# Altium PCB PCB1.PcbDoc (part 1 of 2)
Units mm, origin at the board's own origin, x right, y up, seen from the top; angles counter-clockwise.
Board outline 126.06 x 70 mm, 2 copper layers (Top Layer, Bottom Layer); 146 components, 103 nets, 443 pads, 623 vias.
Unrouted connection lines stored in the file: 85.
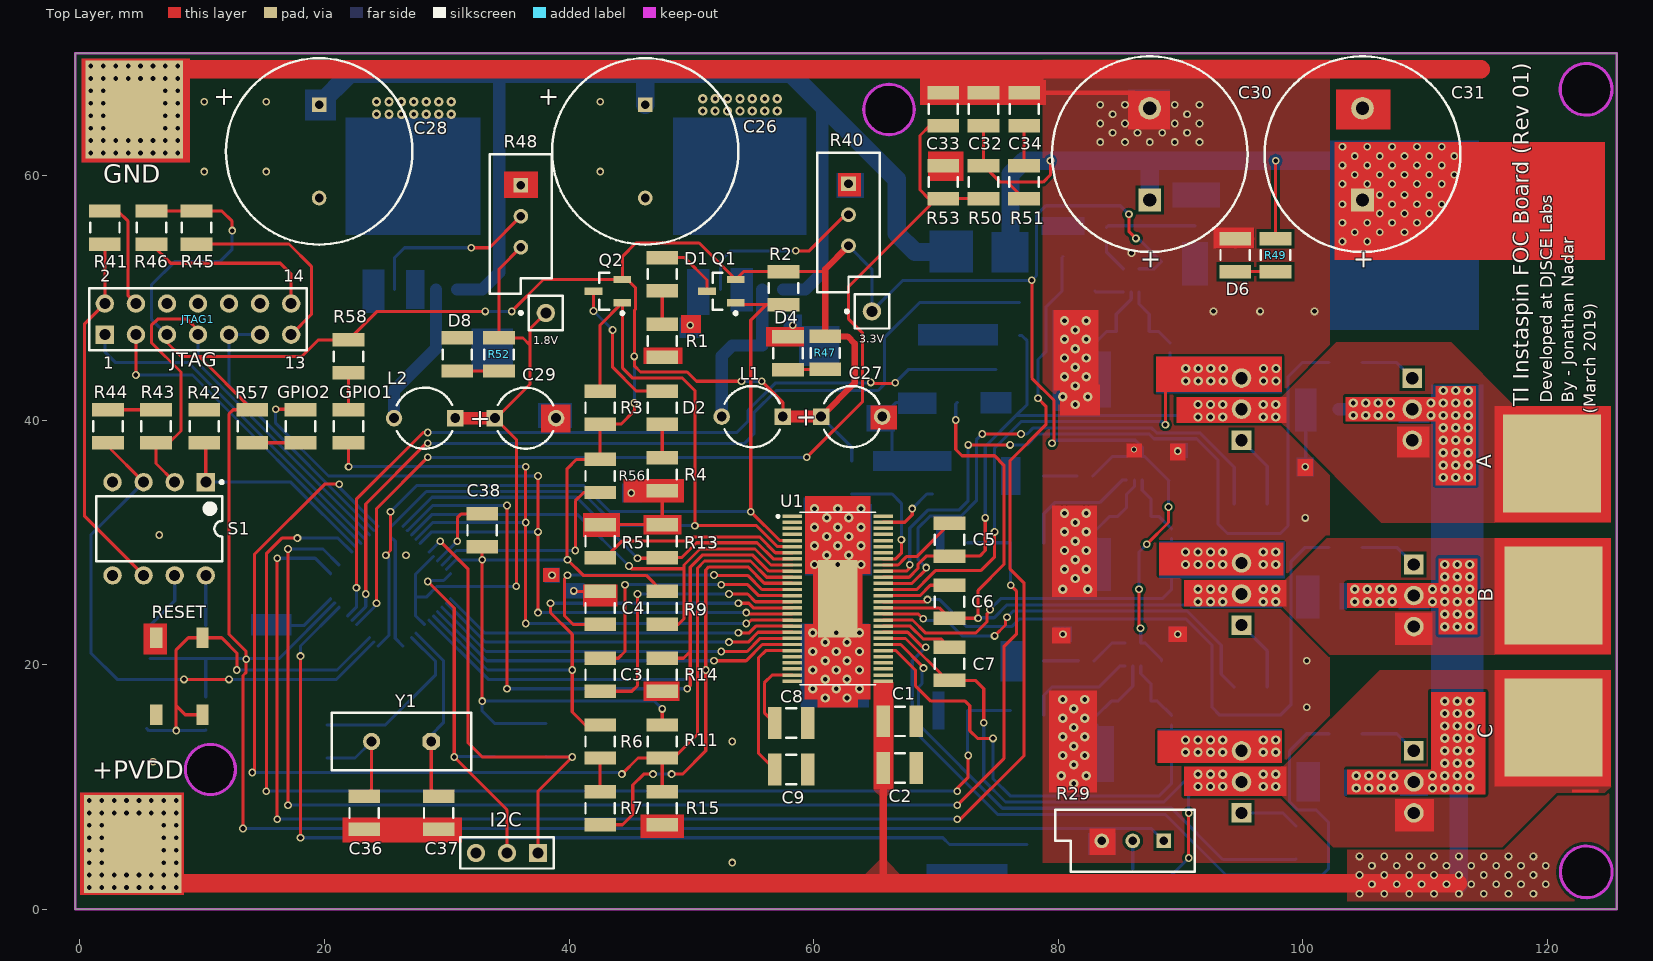
[diagram p0: Top Layer view]
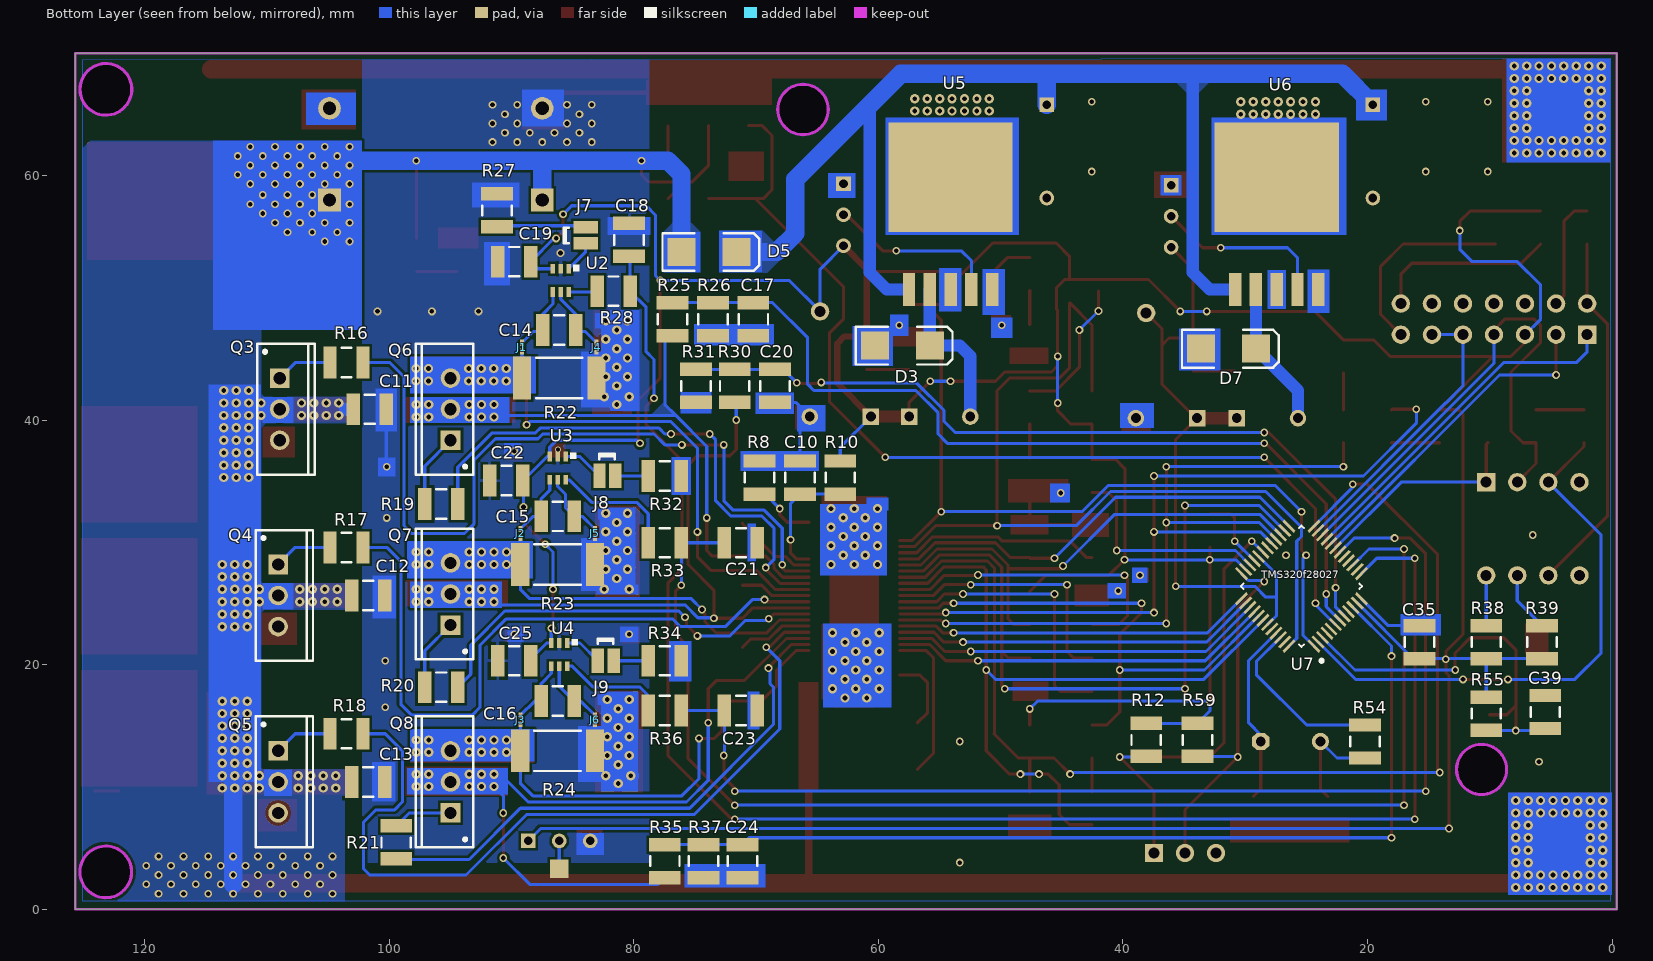
[diagram p1: Bottom Layer view, seen from below]

## Layer stack, top to bottom
Top Solder: solder mask 0.0102, Solder Resist, Dk 3.5
Top Layer: signal copper 0.0356
Dielectric 1: dielectric 0.32, FR-4, Dk 4.8
Bottom Layer: signal copper 0.0356
Bottom Solder: solder mask 0.0102, Solder Resist, Dk 3.5

## Board outline
-0.381,0 -0.381,70 125.682,70 125.682,0

## Design rules (kind name [scope] priority, off if disabled: settings)
Clearance [All] p1: gap=0.225
ComponentClearance [All] p1 off: gap=0.254 collisioncheckmode=3 verticalgap=0.254 showdistances=FALSE
DiffPairsRouting [All] p1: maxlimit=0.254 minlimit=0.254 mostfreqgap=0.254 toplayer_minwidth=0.254 toplayer_maxwidth=0.381 toplayer_prefwidth=0.254 bottomlayer_minwidth=0.254 bottomlayer_maxwidth=0.381 bottomlayer_prefwidth=0.254 maxuncoupledlength=12.7
Height [All] p1 off: minheight=0 maxheight=25.4 prefheight=12.7
PolygonConnect [All] p1: connectstyle=Direct reliefconductorwidth=0.254 reliefentries=4 polygonreliefangle="90 Angle" airgapwidth=0.254
RoutingVias [All] p1: holewidth=0.381 width=0.635 viastyle="Through Hole" minholewidth=0.381 minwidth=0.635 maxholewidth=2.54 maxwidth=5.08
SolderMaskExpansion [All] p1: expansion=0.051
Width [All] p1: maxlimit=2.54 minlimit=0.254 preferedwidth=0.254
26 further rules are at their usual default settings.

## Classes and differential pairs
component class DRV8301_Motor: A B C C11 C12 C13 C14 C15 C16 J1 J2 J3 J4 J5 J6 Q3 Q4 Q5 Q6 Q7 Q8 R16 R17 R18 R19 R20 R21 R22 R23 R24
component class DRV8301: C1 C2 C3 C4 C5 C6 C7 C8 C9 C10 D1 D2 Q1 Q2 R1 R2 R3 R4 R5 R6 R7 R8 R9 R10 R11 R13 R14 R15 U1
component class DRV8301_Sense: C17 C18 C19 C20 C21 C22 C23 C24 C25 J7 J8 J9 R25 R26 R27 R28 R29 R30 R31 R32 R33 R34 R35 R36 R37 U2 U3 U4
component class TMS320f28027: 1.8V 3.3V +PVDD C26 C27 C28 C29 C30 C31 C32 C33 C34 C35 C36 C37 C38 C39 D3 D5 D6 D7 D8 GND GPIO1 GPIO2 I2C JTAG1 L1 L2 R12 R38 R39 R40 R41 R42 R43 R44 R45 R46 R47 R48 R49 R50 R51 R52 R53 R54 R55 R56 R57 R58 R59 R? RESET S1 U5 U6 U7 Y1
differential pair C_ISENSE: +C_ISENSE_P -C_ISENSE_N
differential pair B_ISENSE: +B_ISENSE_P -B_ISENSE_N
differential pair A_ISENSE: +A_ISENSE_P -A_ISENSE_N

## Components (designator, comment, footprint, x,y, rotation, side; value= is the part's Value field where it differs from the comment)
1.8V "Plug" PIN1 38.1,48.768 r90 top
3.3V "Plug" PIN1 64.77,48.895 r90 top (schematic designator D4)
+PVDD "Plug" PCBComponent_1 4.318,5.334 r90 top
A "Plug" PCBComponent_1 120.396,36.449 r270 top (schematic designator SH_A1)
B "Plug" PCBComponent_1 120.523,25.654 r270 top (schematic designator SH_B1)
C "Plug" PCBComponent_1 120.523,14.859 r270 top (schematic designator SH_C1)
C1 "GRM32ER72A225KA35L" C1210 67.056,15.367 r0 top
C2 "GRM188R72A104KA35D" C1210 67.056,11.557 r0 top
C3 "C1608X7R1H223K" C1210 42.545,19.177 r270 top
C4 "GRM219R61E225KA12D" C1210 42.545,24.638 r90 top
C5 "C1608X7R1H104K" C1210 71.12,30.226 r270 top
C6 "C1608X7R1H104K" C1210 71.12,25.146 r270 top
C7 "C1608X7R1H104K" C1210 71.12,20.066 r270 top
C8 "GRM188R61E105KA12D" C1210 58.166,15.24 r0 top
C9 "GRM188R61E105KA12D" C1210 58.166,11.43 r0 top
C10 "C1608X7R1E104K" C1210 66.421,35.306 r90 bottom
C11 "GRM32ER72A225KA35L" C1210 101.6,40.894 r180 bottom
C12 "GRM32ER72A225KA35L" C1210 101.727,25.654 r180 bottom
C13 "GRM32ER72A225KA35L" C1210 101.727,10.414 r180 bottom
C14 "C0603C102J5GAC" C1210 86.106,47.371 r180 bottom
C15 "C0603C102J5GAC" C1210 86.233,32.131 r180 bottom
C16 "C0603C102J5GAC" C1210 86.233,17.018 r180 bottom
C17 "C0603C104J4RACTU" C1210_L 70.231,48.26 r270 bottom
C18 "Cap" C1210_L 80.391,54.737 r270 bottom
C19 "Cap" C1210_L 89.789,52.959 r180 bottom
C20 "C0603C104J4RACTU" C1210_L 68.453,42.799 r270 bottom
C21 "Cap" C1210_L 71.247,29.972 r0 bottom
C22 "Cap" C1210_L 90.424,35.052 r180 bottom
C23 "Cap" C1210_L 71.247,16.256 r0 bottom
C24 "C0603C104J4RACTU" C1210_L 71.12,3.937 r270 bottom
C25 "Cap" C1210_L 89.789,20.32 r180 bottom
C26 "Cap Pol1" RB7.6-15 46.228,61.976 r90 top
C27 "Cap Pol1" CAPPR5-5x11 63.11,40.29 r0 top
C28 "Cap Pol1" RB7.6-15 19.558,61.976 r90 top
C29 "Cap Pol1" CAPPR5-5x11 36.44,40.163 r0 top
C30 "EEE-FC1H221P" CAPPR7.5-16x40 87.494,61.753 r90 top
C31 "EEE-FC1H221P" CAPPR7.5-16x40 104.893,61.753 r90 top
C32 "GRM188R72A104KA35D" C1210_L 73.905,65.436 r90 top
C33 "C0603C104J4RACTU" C1210_L 70.603,65.436 r90 top
C34 "C1608X7R2A103K" C1210_L 77.232,65.436 r90 top
C35 "Cap" C1210_L 15.748,21.844 r90 bottom
C36 "Cap" C1210_L 23.241,7.874 r90 top
C37 "Cap" C1210_L 29.337,7.874 r90 top
C38 "Cap" C1210_L 32.893,30.988 r90 top
C39 "Cap" C1210_L 5.461,16.129 r270 bottom
D1 "D-LED_0805" C1210 47.625,51.943 r90 top
D2 "D-LED_0805" C1210 47.625,41.021 r90 top
D3 "1N5824" SMB 58.039,46.101 r180 bottom
D4 "LED2" C1210_L 57.912,45.466 r90 top
D5 "D Schottky" SMB 73.859,53.752 r180 bottom
D6 "LED2" C1210_L 94.479,53.498 r90 top
D7 "1N5824" SMB 31.369,45.847 r180 bottom
D8 "LED2" C1210_L 30.852,45.37 r90 top
GND "Plug" PCBComponent_1 4.445,65.405 r90 top
GPIO1 "LED2" C1210_L 21.971,39.497 r270 top (schematic designator D10)
GPIO2 "LED2" C1210_L 18.034,39.497 r90 top (schematic designator D9)
I2C "Header 3" HDR1X3 37.465,4.597 r180 top
J1 "2 way net tie junction" 2way_LP 89.154,45.974 r270 bottom net-tie
J2 "2 way net tie junction" 2way_LP 89.281,30.734 r270 bottom net-tie
J3 "2 way net tie junction" 2way_LP 89.281,15.494 r270 bottom net-tie
J4 "2 way net tie junction" 2way_LP 83.058,45.974 r270 bottom net-tie
J5 "2 way net tie junction" 2way_LP 83.185,30.734 r270 bottom net-tie
J6 "2 way net tie junction" 2way_LP 83.185,15.494 r270 bottom net-tie
J7 "2 way net solder junction - Normally Connected" 2waySolder_NC 83.947,55.118 r270 bottom
J8 "2 way net solder junction - Normally Connected" 2waySolder_NC 82.169,35.433 r0 bottom
J9 "2 way net solder junction - Normally Connected" 2waySolder_NC 82.296,20.32 r0 bottom
JTAG1 "JTAG" HDR2X7 2.032,46.99 r0 top
L1 "Inductor" CAPPR5-5x11 54.982,40.29 r180 top
L2 "Inductor" CAPPR5-5x11 28.185,40.163 r180 top
Q1 "PNP" SOT-23B_M 52.451,50.546 r180 top
Q2 "PNP" SOT-23B_M 43.18,50.546 r180 top
Q3 "CSD19536KTT" TO-220AB 108.966,40.894 r270 bottom
Q4 "CSD19536KTT" TO-220AB 109.093,25.654 r270 bottom
Q5 "CSD19536KTT" TO-220AB 109.093,10.414 r270 bottom
Q6 "CSD19536KTT" TO-220AB 94.996,40.894 r90 bottom
Q7 "CSD19536KTT" TO-220AB 94.996,25.781 r90 bottom
Q8 "CSD19536KTT" TO-220AB 94.996,10.414 r90 bottom
R1 "CRCW0603330RJNEA" C1210 47.625,46.482 r90 top
R2 "CRCW060310K0JNEA" C1210 57.531,50.8 r90 top
R3 "CRCW060310K0JNEA" C1210 42.545,41.021 r270 top
R4 "CRCW0603330RJNEA" C1210 47.625,35.56 r90 top
R5 "CRCW06031R00JNEA" C1210 42.545,30.099 r270 top
R6 "CRCW06031K00JNEA" C1210 42.545,13.716 r90 top
R7 "CRCW06031K00JNEA" C1210 42.545,8.255 r270 top
R8 "CRCW060310K0JNEA" C1210 69.723,35.306 r90 bottom
R9 "CRCW060310K0JNEA" C1210 47.625,24.638 r90 top
R10 "CRCW06030000Z0EA" C1210 63.119,35.306 r90 bottom
R11 "CRCW0603100KJNEA" C1210 47.625,13.716 r270 top
R12 "Res1" C1210_L 38.1,13.843 r90 bottom
R13 "CRCW060310K0JNEA" C1210 47.625,30.099 r270 top
R14 "CRCW060310K0JNEA" C1210 47.625,19.177 r90 top
R15 "CRCW06033K00JNEA" C1210 47.625,8.255 r90 top
R16 "CRCW060310R0JNEA" C1210_L 103.505,44.704 r0 bottom
R17 "CRCW060310R0JNEA" C1210 103.505,29.591 r0 bottom
R18 "CRCW060310R0JNEA" C1210 103.505,14.351 r0 bottom
R19 "CRCW060310R0JNEA" C1210 95.758,33.147 r0 bottom
R20 "CRCW060310R0JNEA" C1210 95.758,18.161 r0 bottom
R21 "CRCW060310R0JNEA" C1210 99.441,5.461 r90 bottom
R22 "CRA2512-FZ-R010ELF" RESC6332M 86.106,43.434 r0 bottom
R23 "CRA2512-FZ-R010ELF" RESC6332M 86.233,28.194 r0 bottom
R24 "CRA2512-FZ-R010ELF" RESC6332M 86.233,12.954 r0 bottom
R25 "CRCW060334K8FKEA" C1210_L 76.835,48.26 r90 bottom
R26 "CRCW06034K99FKEA" C1210_L 73.533,48.26 r90 bottom
R27 "Res1" C1210_L 91.186,57.15 r270 bottom
R28 "Res1" C1210_L 81.661,50.546 r0 bottom
R29 "Ref" VR5 86.106,5.588 r180 top
R30 "CRCW060334K8FKEA" C1210_L 71.755,42.799 r90 bottom
R31 "CRCW06034K99FKEA" C1210_L 74.93,42.799 r90 bottom
R32 "Res1" C1210_L 77.47,35.433 r0 bottom
R33 "Res1" C1210_L 77.47,29.972 r0 bottom
R34 "Res1" C1210_L 77.47,20.32 r0 bottom
R35 "CRCW060334K8FKEA" C1210_L 77.47,3.937 r90 bottom
R36 "Res1" C1210_L 77.47,16.256 r0 bottom
R37 "CRCW06034K99FKEA" C1210_L 74.295,3.937 r90 bottom
R38 "Res1" C1210_L 10.287,21.844 r90 bottom
R39 "Res1" C1210_L 5.715,21.844 r90 bottom
R40 "Ref" VR5 62.856,56.8 r270 top
R41 "Res1" C1210_L 2.032,55.753 r90 top
R42 "Res1" C1210_L 10.16,39.497 r270 top
R43 "Res1" C1210_L 6.223,39.497 r270 top
R44 "Res1" C1210_L 2.286,39.497 r270 top
R45 "Res1" C1210_L 9.525,55.753 r270 top
R46 "Res1" C1210_L 5.842,55.753 r270 top
R47 "Res1" C1210_L 60.951,45.497 r90 top
R48 "Ref" VR5 36.059,56.673 r270 top
R49 "Res1" C1210_L 97.781,53.498 r90 top
R50 "CRCW060334K8FKEA" C1210_L 73.905,59.467 r90 top
R51 "CRCW12063R30JNEA" C1210_L 77.207,59.467 r270 top
R52 "Res1" C1210_L 34.281,45.37 r90 top
R53 "CRCW06034K99FKEA" C1210_L 70.603,59.467 r270 top
R54 "Res1" C1210_L 20.193,13.716 r270 bottom
R55 "Res1" C1210_L 10.287,16.002 r90 bottom
R56 "Res1" C1210_L 42.545,35.433 r270 top
R57 "Res1" C1210_L 14.097,39.497 r90 top
R58 "Res1" C1210_L 21.971,45.212 r90 top
R59 "Res1" C1210_L 33.909,13.843 r90 bottom
RESET "TL3342F160QG" *SW_TL3342F160QG 8.128,19.05 r270 top (schematic designator RESET1)
S1 "SW-DIP4" DIP-8 6.477,31.115 r270 top
U1 "DRV8301DCA" *SOP50P810X120-57N 61.976,25.4 r0 top
U2 "INA213" *SC70-6 85.979,51.435 r0 bottom
U3 "INA213" *SC70-6 86.233,36.068 r0 bottom
U4 "INA213" *SC70-6 86.106,20.828 r0 bottom
U5 "LM2596S-5.0" *TO170P1435X465-6N 54.093,59.721 r180 bottom
U6 "LM2596S-5.0" *TO170P1435X465-6N 27.423,59.721 r180 bottom
U7 "TMS320F28027PTT" *QFP50P900X900X160-48N 25.4,26.416 r45 bottom
Y1 "XTAL" BCY-W2/E4.7 26.289,13.716 r180 top

## Footprints (in the part's own frame and the unit in brackets; to place one, negate y for a bottom-side part, rotate by r counter-clockwise, add the part's x,y. Pads: shape width x height; smd on the part's side, far side on the other; paste and mask are expansions set on the pad)
2way_LP [mil] "2 way low power net tie junction"
  rrect5% 20x12 smd paste-100: 1(-14,0) 2(14,0)
2waySolder_NC [mm] "2 way net solder junction - Normally Connected"
  rect 1x2 smd paste-2.032: 1(-0.65,0) 2(0.65,0)
  silkscreen extent -0.62,-1.8 0.65,-1.37, body extent -0.5,-1.15 0.5,1.15, height 0.8
*QFP50P900X900X160-48N [mil]
  rect 52x9 smd: 1(-165,108) 2(-165,89) 3(-165,69) 4(-165,49) 5(-165,30) 6(-165,10) 7(-165,-10) 8(-165,-30) 9(-165,-49) 10(-165,-69) 11(-165,-89) 12(-165,-108) 25(165,-108) 26(165,-89) 27(165,-69) 28(165,-49) 29(165,-30) 30(165,-10) 31(165,10) 32(165,30) 33(165,49) 34(165,69) 35(165,89) 36(165,108)
  rect 9x52 smd: 13(-108,-165) 14(-89,-165) 15(-69,-165) 16(-49,-165) 17(-30,-165) 18(-10,-165) 19(10,-165) 20(30,-165) 21(49,-165) 22(69,-165) 23(89,-165) 24(108,-165) 37(108,165) 38(89,165) 39(69,165) 40(49,165) 41(30,165) 42(10,165) 43(-10,165) 44(-30,165) 45(-49,165) 46(-69,165) 47(-89,165) 48(-108,165)
  silkscreen extent -138,-138 138,138
*SC70-6 [mm]
  rect 0.35x0.8 smd: 1(-0.65,-0.95) 2(0,-0.95) 3(0.65,-0.95) 4(0.65,0.95) 5(0,0.95) 6(-0.65,0.95)
  silkscreen extent -1.53,-1.27 -1.02,-0.76
*SOP50P810X120-57N [mm]
  rect 1.57x0.28 smd: 1(-3.72,6.75) 2(-3.72,6.25) 3(-3.72,5.75) 4(-3.72,5.25) 5(-3.72,4.75) 6(-3.72,4.25) 7(-3.72,3.75) 8(-3.72,3.25) 9(-3.72,2.75) 10(-3.72,2.25) 11(-3.72,1.75) 12(-3.72,1.25) 13(-3.72,0.75) 14(-3.72,0.25) 15(-3.72,-0.25) 16(-3.72,-0.75) 17(-3.72,-1.25) 18(-3.72,-1.75) 19(-3.72,-2.25) 20(-3.72,-2.75) 21(-3.72,-3.25) 22(-3.72,-3.75) 23(-3.72,-4.25) 24(-3.72,-4.75) 25(-3.72,-5.25) 26(-3.72,-5.75) 27(-3.72,-6.25) 28(-3.72,-6.75) 29(3.72,-6.75) 30(3.72,-6.25) 31(3.72,-5.75) 32(3.72,-5.25) 33(3.72,-4.75) 34(3.72,-4.25) 35(3.72,-3.75) 36(3.72,-3.25) 37(3.72,-2.75) 38(3.72,-2.25) 39(3.72,-1.75) 40(3.72,-1.25) 41(3.72,-0.75) 42(3.72,-0.25) 43(3.72,0.25) 44(3.72,0.75) 45(3.72,1.25) 46(3.72,1.75) 47(3.72,2.25) 48(3.72,2.75) 49(3.72,3.25) 50(3.72,3.75) 51(3.72,4.25) 52(3.72,4.75) 53(3.72,5.25) 54(3.72,5.75) 55(3.72,6.25) 56(3.72,6.75)
  rect 3.235x6.35 smd: 57(0,0)
  silkscreen extent -4.99,-7.05 3.1,7.05
*SW_TL3342F160QG [mm]
  rect 1.7x1 smd: 1(-3.15,-1.9) 2(3.15,-1.9) 3(-3.15,1.9) 4(3.15,1.9)
*TO170P1435X465-6N [mil]
  rect 40x106 smd: 1(-134,-356) 2(-67,-356) 3(0,-356) 4(67,-356) 5(134,-356)
  rect 400x352 smd: 6(0,6)
BCY-W2/E4.7 [mm] "Quartz Crystal, Thru-Hole; 2 Leads; Body 11.35 x 4.65 x 13.46 mm (LxWxH max)"
  oct 1.4x1.4 hole 0.8: 1(-2.44,0)
  round 1.4 hole 0.8: 2(2.44,0)
  silkscreen extent -5.7,-2.35 5.7,2.35
C1210 [mm] "Chip Capacitor, Body 3.2x2.5mm, IPC High Density"
  rect 1.1x2.6 smd: 1(-1.35,0) 2(1.35,0)
  silkscreen extent -0.4,-1.2 0.4,1.2, body extent -1.7,-1.35 1.7,1.35, height 1.3
C1210_L [mm] "Chip Capacitor, Body 3.2x2.5mm, IPC High Density"
  rect 1.1x2.6 smd: 1(-1.35,0) 2(1.35,0)
  silkscreen extent -0.4,-1.2 0.4,1.2, body extent -1.7,-1.35 1.7,1.35, height 1.5
CAPPR5-5x11 [mm] "Capacitor, Electrolytic, Radial; Body 5 x 11 mm (Dia.xH typ); Pin Spacing 5 mm (typ)"
  rect 1.35x1.35 hole 0.8: 1(-2.5,0)
  round 1.35 hole 0.8: 2(2.5,0)
  silkscreen extent -2.26,-2.5 2.27,2.5
CAPPR7.5-16x40 [mm] "Capacitor, Electrolytic, Radial; Body 16 x 40 mm (Dia.xH typ); Pin Spacing 7.5 mm (typ)"
  rect 1.85x1.85 hole 1.1: 1(-3.75,0)
  round 1.85 hole 1.1: 2(3.75,0)
  silkscreen extent -8,-8 8,8
DIP-8 [mm] "DIP; 8 Leads; Row Spacing 7.62 mm; Pitch 2.54 mm"
  rect 1.5x1.5 hole 0.9: 1(-3.81,3.81)
  round 1.5 hole 0.9: 2(-3.81,1.27) 3(-3.81,-1.27) 4(-3.81,-3.81) 5(3.81,-3.81) 6(3.81,-1.27) 7(3.81,1.27) 8(3.81,3.81)
  silkscreen extent -3.93,-5.15 2.65,5.24, body extent -3.6,-5.15 3.6,5.15, height 5.08
HDR1X3 [mm] "Connector; Header; 3 Position"
  rect 1.5x1.5 hole 0.9: 1(0,0)
  round 1.5 hole 0.9: 2(2.54,0) 3(5.08,0)
  silkscreen extent -1.27,-1.27 6.35,1.27
HDR2X7 [mm] "Connector; Header; 7x2 Position"
  rect 1.5x1.5 hole 0.9: 1(0,0)
  round 1.5 hole 0.9: 2(0,2.54) 3(2.54,0) 4(2.54,2.54) 5(5.08,0) 6(5.08,2.54) 7(7.62,0) 8(7.62,2.54) 9(10.16,0) 10(10.16,2.54) 11(12.7,0) 12(12.7,2.54) 13(15.24,0) 14(15.24,2.54)
  silkscreen extent -1.27,-1.27 16.51,3.81
PCBComponent_1 [mm]
  rect 8x8 / inner rect 8x8 / far side rect 0x0 all layers, no hole: 1(0,0)
PIN1 [mm] "Connector; Plug"
  round 1.5 hole 0.9: 1(0,0)
  silkscreen extent -1.4,-1.4 1.4,2.17
RB7.6-15 [mm] "Polarized Capacitor (Radial); 2 Leads"
  rect 1.2x1.2 hole 0.7: 1(3.81,0)
  round 1.2 hole 0.7: 2(-3.81,0)
  silkscreen extent -7.62,-7.62 7.62,7.62
RESC6332M [mm] "Chip Resistor, Body 6.3x3.2mm, IPC Low Density"
  rect 1.5x3.5 smd: 1(-3.05,0) 2(3.05,0)
  silkscreen extent -1.9,-1.65 1.9,1.65, body extent -3.22,-1.68 3.22,1.68, height 0.71
SMB [mm] "DO-214-AA/SMB; 2 C-Bend Leads; Body 5.3 x 3.6 mm, inc. leads (LxW)"
  rect 2.3x2.3 smd: 1(-2.25,0) 2(2.25,0)
  silkscreen extent -3.8,-1.55 4.1,1.55
SOT-23B_M [mm] "SOT23, 3-Leads, Body 2.9x1.3mm, Pitch 0.95mm, Lead Span 2.4mm, IPC Low Density"
  rect 1.45x0.6 smd: 1(-1.175,0.95) 2(-1.175,-0.95) 3(1.175,0)
  silkscreen extent -1.3,-1.5 0.7,1.92, body extent -0.7,-1.5 0.7,1.5, height 1.14
TO-220AB [mm] "TO, Thru-Hole, Vertical, Heatsink Mounted; 3 In-Line Leads; Pitch 2.54 mm"
  rect 1.6x1.6 hole 1: 1(-2.54,0)
  round 1.6 hole 1: 2(0,0) 3(2.54,0)
  silkscreen extent -5.35,-1.85 5.35,2.85, body extent -5.4,-1.9 5.4,2.9, height 19.3
VR5 [mm] "Thru-Hole; 3 Leads"
  rect 1.2x1.2 hole 0.7: 1(-2.54,0)
  round 1.2 hole 0.7: 2(0,0) 3(2.54,0)
  silkscreen extent -5.08,-2.54 6.35,2.54

## Part data
C1 C11 C12 C13: "CAP, CERM, 2.2uF, 100V, +/-10%, X7R, 1210"
C2 C32: "CAP, CERM, 0.1uF, 100V, +/-10%, X7R, 0603"
C3: "CAP, CERM, 0.022uF, 50V, +/-10%, X7R, 0603"
C4: "CAP, CERM, 2.2uF, 25V, +/-10%, X5R, 0805"
C5 C6 C7: "CAP, CERM, 0.1uF, 50V, +/-10%, X7R, 0603"
C8 C9: "CAP, CERM, 1uF, 25V, +/-10%, X5R, 0603"
C10: "CAP, CERM, 0.1uF, 25V, +/-10%, X7R, 0603"
C14 C15 C16: "CAP, CERM, 1000pF, 50V, +/-5%, C0G/NP0, 0603"
C17 C20 C24 C33: "CAP, CERM, 0.1uF, 16V, +/-5%, X7R, 0603"
C18 C19 C21 C22 C23 C25 C35 C36 C37 C38 C39: "Capacitor"
C26 C27 C28 C29: "Polarized Capacitor (Radial)"
C30 C31: "CAP, AL, 220uF, 50V, +/-20%, 0.3 ohm, SMD"
C34: "CAP, CERM, 0.01uF, 100V, +/-10%, X7R, 0603"
D1: "LED THIN 585NM YEL DIFF 0805 SMD"
D2: "LED THIN660NM SUPRED DIFF0805SMD"
D3 D7: library part "D Schottky", "Schottky Diode"
D4 D6 D8 GPIO1 GPIO2: "Typical RED, GREEN, YELLOW, AMBER GaAs LED"
D5: "Schottky Diode"
I2C: "Header, 3-Pin"
J1 J2 J3 J4 J5 J6: library part 2way
J7 J8 J9: library part 2waySolderNC
JTAG1: library part "Header 7X2", "Header, 7-Pin, Dual row"
Q1 Q2: "PNP Bipolar Transistor"
Q3 Q4 Q5 Q6 Q7 Q8: library part NMOS-2, "N-Channel Power MOSFET"
R1 R4: "RES, 330 ohm, 5%, 0.1W, 0603"
R2 R3 R8 R9 R13 R14: "RES, 10k ohm, 5%, 0.1W, 0603"
R5: "RES, 1.0 ohm, 5%, 0.1W, 0603"
R6 R7: "RES, 1.0k ohm, 5%, 0.1W, 0603"
R10: "RES, 0 ohm, 5%, 0.1W, 0603"
R11: "RES, 100k ohm, 5%, 0.1W, 0603"
R12 R27 R28 R32 R33 R34 R36 R38 R39 R41 R42 R43 R44 R45 R46 R47 R49 R52 R54 R55 R56 R57 R58 R59: "Resistor"
R15: "RES, 3.0k ohm, 5%, 0.1W, 0603"
R16 R17 R18 R19 R20 R21: "RES, 10 ohm, 5%, 0.1W, 0603"
R22 R23 R24: "RES, 0.01 ohm, 1%, 3W, 2512"
R25 R30 R35 R50: "RES, 34.8k ohm, 1%, 0.1W, 0603"
R26 R31 R37 R53: "RES, 4.99k ohm, 1%, 0.1W, 0603"
R29 R40 R48: library part RPot, "Potentiometer"
R51: "RES, 3.3 ohm, 5%, 0.25W, 1206"
RESET: "TL3342 Series SPST 1.6 N Round Button Gull Wing Surface Mount Tactile Switch"
S1: "DIP Switch"
U1: library part DRV8302DCA_ERIC, "IC, 3 Phase Pre-Driver with Dual Current Shunt Amplifiers and Buck Regulator-Hardware Controlled"
U2 U3 U4: "Voltage Output High/Low-Side Measurement Bi-Directional Zero-Drift Series Current Shunt Monitor"
U5 U6: "SIMPLE SWITCHER Power Converter 150 KHz 3A Step-Down Voltage Regulator 5-DDPAK/TO-263"
U7: "MCU 32-bit Piccolo F2802x C28x RISC 64KB Flash 3.3V 48-Pin LQFP Tray"
Y1: "Crystal Oscillator"

## Free pads (board coordinates)
  round 1.524 hole 4: 0(10.668,11.43) 0(66.167,65.405) 0(123.182,67.056) 0(123.19,3.048)
  rect 0x0 / inner rect 1.524x1.524 / far side rect 1.524x1.524 all layers, no hole paste+0: 0(86.106,3.302)

## Via types
v1: diameter 0.762, hole 0.381, Top Layer to Bottom Layer, 368 vias
v2: diameter 0.635, hole 0.381, Top Layer to Bottom Layer, 254 vias
v3: diameter 0.5, hole 0.3, Top Layer to Bottom Layer, 1 vias

## Nets (pads, with @x,y where several pads share a name; then routed paths per layer and width w, separated by ;. In a path a pad name is that pad's centre, name@x,y a point inside that pad or via, vN(x,y) a via of type N, cw(c..) or ccw(c..) an arc to the next point about the centre after c; other vN are vias at no path point)
+1.8V: 1.8V.1 C29.1 L2.1 R48.3 R52.2 U7.32 U7.43 | length 53.8
  Top Layer w0.254: C29.1@33.94,40.163 35.687,38.416 v2(35.687,26.416) ; C29.1@34.194,40.33 36.821,42.957 36.821,46.132 ; R48.3@36.059,54.133 34.281,52.355 R52.2@34.281,46.72 36.233,46.72 36.821,46.132 ; 1.8V.1@38.1,48.768 36.821,47.489 36.821,46.132
  Top Layer w1: L2.1@30.685,40.163 C29.1@33.94,40.163
  Bottom Layer w0.254: U7.43@28.184,23.273 27.432,24.025 27.432,25.527 ; U7.32@28.902,28.841 27.432,27.37 27.432,25.527 ; v2(35.687,26.416) 35.673,26.402 29.196,26.402 28.321,25.527 27.432,25.527
+3.3V: 3.3V.1 C19.2 C22.2 C25.2 C27.1 C35.1 C38.1 JTAG1.5 L1.1 Q1.2 Q2.2 R2.2 R3.2 R9.2 R10.2 R11.1 R12.2 R29.1 R38.1 R39.1 R40.3 R45.1 R46.1 R47.2 R55.2 R56.1 R57.2 R58.2 R59.2 U2.3 U3.3 U4.3 U7.11 U7.35 | length 428.8
  Top Layer w0.254: R46.1@5.842,57.103 R45.1@9.525,57.103 11.604,57.103 12.446,56.261 v2(12.446,55.499) ; JTAG1.5@7.112,46.99 7.112,46.355 8.255,45.212 9.732,45.212 ; v2(13.335,6.604) 13.335,19.119 13.589,19.373 v2(13.589,20.447) 13.589,21.082 12.192,22.479 12.192,40.513 12.526,40.847 R57.2@14.097,40.847 9.732,45.212 ; v2(32.893,17.018) v2(32.893,28.575) C38.1@32.893,29.638 ; v2(33.147,48.895) 24.304,48.895 R58.2@21.971,46.562 19.511,46.562 18.161,45.212 9.732,45.212 ; v2(35.306,48.895) 37.907,51.496 Q2.2@44.355,51.496 ; v2(45.339,41.402) 45.339,40.767 44.243,39.671 R3.2@42.545,39.671 R56.1@42.545,36.783 40.593,36.783 39.843,36.033 39.843,28.61 v2(39.878,28.575) 41.148,27.305 46.308,27.305 R9.2@47.625,25.988 ; R11.1@47.625,15.066 v2(47.625,16.383) ; v2(54.102,43.18) 50.419,43.18 49.657,43.942 45.847,43.942 45.339,44.45 v2(45.339,45.212) 45.339,48.964 45.432,49.057 45.432,50.834 44.77,51.496 Q2.2@44.355,51.496 ; v2(55.753,43.18) 57.482,41.451 L1.1@57.482,40.29 ; 60.746,52.15 R2.2@57.531,52.15 54.28,52.15 Q1.2@53.626,51.496 50.639,54.483 45.466,54.483 44.355,53.372 Q2.2@44.355,51.496 ; v2(77.851,51.435) 77.851,43.434 79.664,41.621 79.664,38.262 v2(79.502,38.1) ; v2(85.788,56.832) 85.788,55.435 v2(86.36,54.864) ; v2(86.614,26.162) 86.614,23.114 v2(86.741,22.987) ; v2(87.249,29.845) 89.027,31.623 v2(89.027,32.893)
  Top Layer w0.508: C27.1@60.61,40.29 63.364,43.044 63.364,46.259 62.776,46.847 R47.2@60.951,46.847 60.951,52.355 R40.3@62.856,54.26
  Top Layer w1: L1.1@57.482,40.29 C27.1@60.61,40.29
  Bottom Layer w0.254: R39.1@5.715,20.494 R38.1@10.287,20.494 ; JTAG1.5@7.112,46.99 5.842,48.26 5.842,51.054 7.747,52.959 11.43,52.959 12.446,53.975 v2(12.446,55.499) ; R55.2@10.287,17.352 R38.1@10.287,20.494 ; v2(13.335,6.604) 87.63,6.604 R29.1@88.646,5.588 ; v2(13.589,20.447) v2@13.589,20.494 ; U7.11@20.838,25.051 16.281,20.494 C35.1@15.748,20.494 v2@13.589,20.494 ; U7.35@29.962,27.781 30.756,28.575 v2(32.893,28.575) v2(39.878,28.575) ; v2(33.147,48.895) v2(35.306,48.895) ; R12.2@38.1,15.193 R59.2@33.909,15.193 32.893,16.209 v2(32.893,17.018) 46.99,17.018 v2(47.625,16.383) ; v2(45.339,41.402) v2(45.339,45.212) ; v2(54.102,43.18) v2(55.753,43.18) ; C27.1@60.61,40.29 63.119,37.781 R10.2@63.119,36.656 ; R40.3@62.856,54.26 64.77,52.346 3.3V.1@64.77,48.895 67.31,51.435 v2(77.851,51.435) 78.232,51.816 78.232,56.769 78.994,57.531 85.09,57.531 v2(85.788,56.832) ; v2(79.502,38.1) 79.756,38.354 86.309,38.354 86.883,37.78 U3.3@86.883,37.018 87.108,37.018 C22.2@89.074,35.052 89.027,35.005 v2(89.027,32.893) ; v2(86.36,54.864) 86.534,54.864 C19.2@88.439,52.959 87.865,52.385 U2.3@86.629,52.385 ; v2(86.614,26.162) 86.614,29.21 v2(87.249,29.845) ; v2(86.741,22.987) 86.741,23.084 86.756,23.099 U4.3@86.756,21.778 87.122,21.778 88.439,20.461 C25.2@88.439,20.32 ; R38.1@10.287,20.494 v2@13.589,20.494
+PSUP: C26.1 C28.1 D5.2 U5.1 U6.1 | length 102.4
  Bottom Layer w1: U6.1@30.827,50.679 32.899,50.679 34.29,52.07 34.29,68.326 ; U5.1@57.497,50.679 59.315,50.679 60.706,52.07 60.706,65.786
  Bottom Layer w1.5: C28.1@19.558,65.817 22.067,68.326 34.29,68.326 46.228,68.326 ; C26.1@46.228,65.786 46.228,68.326 ; D5.2@71.909,53.752 68.317,53.752 66.793,55.276 66.793,59.699 58.166,68.326 46.228,68.326
+PVDD: +PVDD.1 C1.1 C2.1 C11.1 C12.1 C13.1 C30.1 C31.1 C32.1 D5.1 Q3.2 Q4.2 Q5.2 R49.2 R50.2 R51.2 U1.29 | length 232.5
  Top Layer w0.254: C1.1@65.706,15.193 C1.1@65.706,15.367 ; C32.1@73.905,64.086 R50.2@73.905,60.817 75.255,59.467 75.857,59.467 ; R51.2@77.207,58.117 75.857,59.467 ; v2(79.375,61.214) 79.375,60.071 78.771,59.467 75.857,59.467 ; R49.2@97.781,54.848 97.781,61.205 v2(97.79,61.214)
  Top Layer w0.635: 65.706,2.112 C2.1@65.706,11.557
  Top Layer w1.5: +PVDD.1@4.318,5.334 v1(6.858,2.794) 7.54,2.112 65.706,2.112 112.696,2.112
  Bottom Layer w1: C11.1@102.95,40.894 103.632,40.894 ; Q3.2@108.966,40.894 112.268,40.894 112.268,26.543 ; Q5.2@109.093,10.414 110.363,10.414 112.268,12.319 112.268,26.543 ; Q4.2@109.093,25.654 111.379,25.654 112.268,26.543
  Bottom Layer w1.5: D5.1@76.109,53.752 76.109,60.107 77.216,61.214 v2(79.375,61.214) v2(97.79,61.214) 102.87,61.214 ; C30.1@87.494,58.003 87.494,60.443 ; C31.1@104.893,58.003 104.893,59.191 102.87,61.214 ; 108.204,61.214 102.87,61.214 ; v1@112.522,10.668 112.776,10.414 112.776,2.032
  other v1: 0.762,1.778 1.778,1.778 2.794,1.778 3.81,1.778 4.826,1.778 5.842,1.778 6.858,1.778 7.874,1.778 0.762,2.794 1.778,2.794 2.794,2.794 3.81,2.794 4.826,2.794 5.842,2.794 7.874,2.794 0.762,3.81 1.778,3.81 6.858,3.81 7.874,3.81 0.762,4.826 1.778,4.826 6.858,4.826 7.874,4.826 0.762,5.842 1.778,5.842 6.858,5.842 7.874,5.842 0.762,6.858 1.778,6.858 6.858,6.858 7.874,6.858 0.762,7.874 1.778,7.874 2.794,7.874 3.81,7.874 4.826,7.874 5.842,7.874 6.858,7.874 7.874,7.874 0.762,8.89 1.778,8.89 2.794,8.89 3.81,8.89 4.826,8.89 5.842,8.89 6.858,8.89 7.874,8.89 104.394,9.906 105.41,9.906 106.426,9.906 107.442,9.906 110.617,9.906 111.633,9.906 112.649,9.906 113.665,9.906 104.394,10.922 105.41,10.922 106.426,10.922 107.442,10.922 110.617,10.922 111.633,10.922 112.649,10.922 113.665,10.922 111.633,11.938 112.649,11.938 113.665,11.938 111.633,12.954 112.649,12.954 113.665,12.954 111.633,13.97 112.649,13.97 113.665,13.97 111.633,14.986 112.649,14.986 113.665,14.986 111.633,16.002 112.649,16.002 113.665,16.002 111.633,17.018 112.649,17.018 113.665,17.018 111.633,23.114 112.649,23.114 113.665,23.114 111.633,24.13 112.649,24.13 113.665,24.13 104.267,25.146 105.283,25.146 106.299,25.146 107.315,25.146 110.617,25.146 111.633,25.146 112.649,25.146 113.665,25.146 104.267,26.162 105.283,26.162 106.299,26.162 107.315,26.162 110.617,26.162 111.633,26.162 112.649,26.162 113.665,26.162 111.633,27.178 112.649,27.178 113.665,27.178 111.633,28.194 112.649,28.194 113.665,28.194 111.506,35.306 112.522,35.306 113.538,35.306 111.506,36.322 112.522,36.322 113.538,36.322 111.506,37.338 112.522,37.338 113.538,37.338 111.506,38.354 112.522,38.354 113.538,38.354 111.506,39.37 112.522,39.37 113.538,39.37 104.14,40.386 105.156,40.386 106.172,40.386 107.188,40.386 110.49,40.386 111.506,40.386 112.522,40.386 113.538,40.386 104.14,41.402 105.156,41.402 106.172,41.402 107.188,41.402 110.49,41.402 111.506,41.402 112.522,41.402 113.538,41.402 111.506,42.418 112.522,42.418 113.538,42.418
  other v2: 104.648,1.27 106.68,1.27 108.712,1.27 110.744,1.27 112.776,1.27 114.808,1.27 116.84,1.27 118.872,1.27 105.664,2.032 107.696,2.032 109.728,2.032 111.76,2.032 113.792,2.032 115.824,2.032 117.856,2.032 119.888,2.032 104.648,2.794 106.68,2.794 108.712,2.794 110.744,2.794 112.776,2.794 114.808,2.794 116.84,2.794 118.872,2.794 105.664,3.556 107.696,3.556 109.728,3.556 111.76,3.556 113.792,3.556 115.824,3.556 117.856,3.556 119.888,3.556 104.648,4.318 106.68,4.318 108.712,4.318 110.744,4.318 112.776,4.318 114.808,4.318 116.84,4.318 118.872,4.318 103.251,54.61 105.283,54.61 104.267,55.372 106.299,55.372 108.331,55.372 103.251,56.134 105.283,56.134 107.315,56.134 109.347,56.134 106.299,56.896 108.331,56.896 110.363,56.896 103.251,57.658 107.315,57.658 109.347,57.658 111.379,57.658 106.299,58.42 108.331,58.42 110.363,58.42 103.251,59.309 105.283,59.309 107.315,59.309 109.347,59.309 111.379,59.309 104.267,60.071 106.299,60.071 108.331,60.071 110.363,60.071 112.395,60.071 103.251,60.833 105.283,60.833 107.315,60.833 109.347,60.833 111.379,60.833 104.267,61.595 106.299,61.595 108.331,61.595 110.363,61.595 112.395,61.595 103.251,62.357 105.283,62.357 107.315,62.357 109.347,62.357 111.379,62.357
\FAULT: Q2.1 R3.1 U1.6 U7.48 | length 77.1
  Top Layer w0.254: R3.1@42.545,42.371 42.545,47.786 Q2.1@44.355,49.596 44.355,44.291 45.212,43.434 49.276,43.434 50.292,42.418 v2(50.292,31.369) 55.33,31.369 57.049,29.65 U1.6@58.256,29.65
  Bottom Layer w0.254: U7.48@26.424,21.513 25.781,22.156 25.781,30.099 25.4,30.48 25.4,31.242 28.327,34.169 40.804,34.169 40.809,34.163 41.021,34.163 43.815,31.369 v2(50.292,31.369)
\OCTW: Q1.1 R2.1 U1.5 U7.1 | length 68.7
  Top Layer w0.254: v2(25.019,28.956) 25.4,29.337 v2(25.4,32.512) ; Q1.1@53.626,49.596 53.772,49.45 56.134,49.45 ; R2.1@57.531,49.45 56.134,49.45 ; U1.5@58.264,30.158 U1.5@58.256,30.15 57.226,30.15 v2(54.864,32.512) 54.864,48.18 56.134,49.45
  Bottom Layer w0.254: U7.1@24.376,21.513 25.273,22.41 25.273,28.702 v2(25.019,28.956) ; v2(25.4,32.512) 27.536,34.648 41.214,34.648 43.349,32.512 v2(54.864,32.512)
A_ISENSE_N: C14.2 J4.1 U2.5 | length 5.8
  Bottom Layer w0.254: J4.1@83.058,46.33 83.972,47.244 84.756,47.244 84.756,48.672 85.979,49.895 U2.5@85.979,50.485
A_ISENSE_P: C14.1 J1.1 U2.4 | length 5.7
  Bottom Layer w0.254: U2.4@86.629,50.485 86.629,49.499 87.456,48.672 87.456,47.244 88.24,47.244 J1.1@89.154,46.33
B_ISENSE_N: C15.2 J5.1 U3.5 | length 5.7
  Bottom Layer w0.254: J5.1@83.185,31.09 84.226,32.131 C15.2@84.883,32.131 85.589,32.837 85.589,33.931 86.233,34.575 U3.5@86.233,35.118
B_ISENSE_P: C15.1 J2.1 U3.4 | length 5.4
  Bottom Layer w0.254: U3.4@86.883,35.118 86.883,34.259 87.583,33.559 C15.1@87.583,32.131 88.24,32.131 J2.1@89.281,31.09
BIAS/VDD_SPI: C10.1 R10.1 U1.49 | length 10.1
  Top Layer w0.254: U1.49@65.696,28.65 66.726,28.65 67.183,29.107 v2(67.183,30.226)
  Bottom Layer w0.254: R10.1@63.119,33.956 C10.1@66.421,33.956 67.183,33.194 v2(67.183,30.226)
C_ISENSE_N: C16.2 J6.1 U4.5 | length 5.5
  Bottom Layer w0.254: J6.1@83.185,15.85 84.353,17.018 C16.2@84.883,17.018 86.106,18.241 U4.5@86.106,19.878
C_ISENSE_P: C16.1 J3.1 U4.4 | length 5.4
  Bottom Layer w0.254: U4.4@86.756,19.878 86.756,19.273 87.583,18.446 C16.1@87.583,17.018 88.113,17.018 J3.1@89.281,15.85
DC_CAL: R7.2 U1.12 U7.42 | length 60
  Top Layer w0.254: R7.2@42.545,6.905 44.37,6.905 45.212,7.747 45.212,10.16 46.101,11.049 v2(46.863,11.049) ; v2(48.387,11.049) 49.276,11.049 51.181,12.954 v2(51.181,19.558) 51.181,27.744 51.435,27.998 54.636,27.998 55.976,26.658 58.248,26.658 U1.12@58.256,26.65
  Bottom Layer w0.254: U7.42@28.543,23.632 33.379,18.796 50.419,18.796 v2(51.181,19.558) ; v2(46.863,11.049) v2(48.387,11.049)
DC_V_FB: C33.1 R50.1 R53.2 U7.6 | length 85.8
  Top Layer w0.254: v2(24.257,25.019) 24.257,32.766 v2(28.448,36.957) ; v2(59.436,36.957) 64.008,41.529 64.008,47.117 62.865,48.26 62.865,50.927 R53.2@70.055,58.117 ; C33.1@70.603,64.086 69.507,64.086 68.698,63.277 68.698,58.832 69.413,58.117 R53.2@70.055,58.117 ; R50.1@73.905,58.117 R53.2@70.603,58.117 R53.2@70.055,58.117
  Bottom Layer w0.254: U7.6@22.616,23.273 24.257,24.914 v2(24.257,25.019) ; v2(28.448,36.957) v2(59.436,36.957)
EN_GATE: R6.2 U1.16 U7.41 | length 45.5
  Top Layer w0.254: v2(38.481,25.019) 38.481,24.257 40.259,22.479 v2(40.259,19.558) 40.259,16.129 41.322,15.066 R6.2@42.545,15.066 ; v2(53.848,25.019) 54.695,25.019 55.064,24.65 U1.16@58.256,24.65
  Bottom Layer w0.254: U7.41@28.902,23.991 33.336,19.558 v2(40.259,19.558) ; v2(38.481,25.019) v2(53.848,25.019)
FB1.8: R48.2 U6.4 | length 14.7
  Top Layer w0.254: v2(32.004,54.102) 33.488,54.102 R48.2@36.059,56.673 R48.2@35.678,56.673
  Bottom Layer w0.254: U6.4@25.721,50.679 25.721,53.28 26.543,54.102 v2(32.004,54.102)
FB3.3: R40.2 U5.4 | length 14.4
  Top Layer w0.254: v2(58.547,53.848) 59.65,53.848 62.602,56.8 R40.2@62.856,56.8
  Bottom Layer w0.254: U5.4@52.391,50.679 52.391,53.026 53.213,53.848 v2(58.547,53.848)
GAIN/SDO: R14.2 U1.10 U7.26 | length 60.5
  Top Layer w0.254: v2(34.925,18.034) v2(34.925,33.02) ; R14.2@47.625,20.527 49.356,20.527 49.911,21.082 ; v2(49.657,18.034) 49.911,18.288 49.911,21.082 ; 49.911,27.982 49.911,21.082 ; 49.94,28.011 50.885,28.956 55.033,28.956 56.339,27.65 U1.10@58.256,27.65
  Bottom Layer w0.254: U7.26@26.765,30.978 26.806,30.978 28.848,33.02 v2(34.925,33.02) ; v2(34.925,18.034) v2(49.657,18.034)
GH_A: R16.1 U1.47 | length 65.2
  Top Layer w0.254: U1.47@65.696,27.65 67.604,27.65 67.869,27.915 v2(67.869,28.169) ; v2(72.644,37.973) v2(76.073,37.973)
  Bottom Layer w0.254: v2@67.97,28.067 v2(67.869,28.169) 67.869,31.166 69.342,32.639 71.882,32.639 72.644,33.401 v2(72.644,37.973) ; v2(76.073,37.973) 77.47,37.973 78.359,38.862 87.461,38.862 87.847,38.475 89.249,38.475 89.254,38.481 91.313,38.481 93.091,36.703 93.091,31.496 93.853,30.734 98.171,30.734 98.806,31.369 98.806,43.561 99.949,44.704 R16.1@102.155,44.704
GH_B: R17.1 U1.42 | length 56.5
  Top Layer w0.254: U1.42@65.696,25.15 69.15,25.15 v2(69.319,25.319)
  Bottom Layer w0.254: v2(69.319,25.319) 70.312,25.319 72.517,23.114 76.2,23.114 76.835,23.749 90.424,23.749 92.583,21.59 92.583,16.51 93.218,15.875 98.171,15.875 99.06,16.764 99.06,28.448 100.203,29.591 R17.1@102.155,29.591
GH_C: R18.1 U1.37 | length 66
  Top Layer w0.254: U1.37@65.696,22.65 67.689,22.65 v2@68.996,21.344 ; v2(69.18,21.429) v2@69.265,21.344
  Bottom Layer w0.254: v2(69.18,21.429) 68.072,20.32 68.072,14.732 75.057,7.747 88.773,7.747 93.726,2.794 101.6,2.794 102.108,3.302 102.108,7.112 101.092,8.128 99.568,8.128 98.933,8.763 98.933,12.954 100.33,14.351 R18.1@102.155,14.351
GL_A: R19.1 U1.45 | length 44.2
  Top Layer w0.254: U1.45@65.696,26.65 68.052,26.65 69.215,27.813 v2(69.215,27.94) ; v2(73.787,38.862) v2(76.962,38.862)
  Bottom Layer w0.254: v2(69.215,27.94) 68.529,28.626 68.529,31.149 69.54,32.16 72.08,32.16 73.314,33.393 73.314,38.389 v2(73.787,38.862) ; v2(76.962,38.862) 77.47,38.862 77.978,39.37 87.63,39.37 88.046,38.954 89.05,38.954 89.056,38.96 91.596,38.96 94.408,36.148 R19.1@94.408,33.147
GL_B: R20.1 U1.40 | length 34.8
  Top Layer w0.254: U1.40@65.696,24.15 68.56,24.15 v2(68.961,23.749) ; v2(74.803,22.352) 75.692,23.241 75.692,23.749 v2(75.819,23.876)
  Bottom Layer w0.254: v2(68.961,23.749) 68.834,23.622 70.866,23.622 72.136,22.352 v2(74.803,22.352) ; v2(75.819,23.876) 76.327,24.384 90.551,24.384 93.345,21.59 93.345,19.224 R20.1@94.408,18.161
GL_C: R21.1 U1.35 | length 44.4
  Top Layer w0.254: U1.35@65.696,21.65 67.123,21.65 68.897,19.875 68.897,19.818 v2(68.995,19.72)
  Bottom Layer w0.254: v2(68.995,19.72) 68.869,19.72 68.869,18.45 68.58,18.161 68.58,15.113 75.438,8.255 89.281,8.255 93.472,4.064 99.394,4.064 R21.1@99.441,4.111